# Altium PCB pcb_hydra_power.PcbDoc
Units mm, origin at the board's own origin, x right, y up, seen from the top; angles counter-clockwise.
Board outline 37.5 x 28.5 mm, 2 copper layers (Top Layer, Bottom Layer), stack 1.671 mm thick; 17 components, 15 nets, 56 pads, 17 vias.
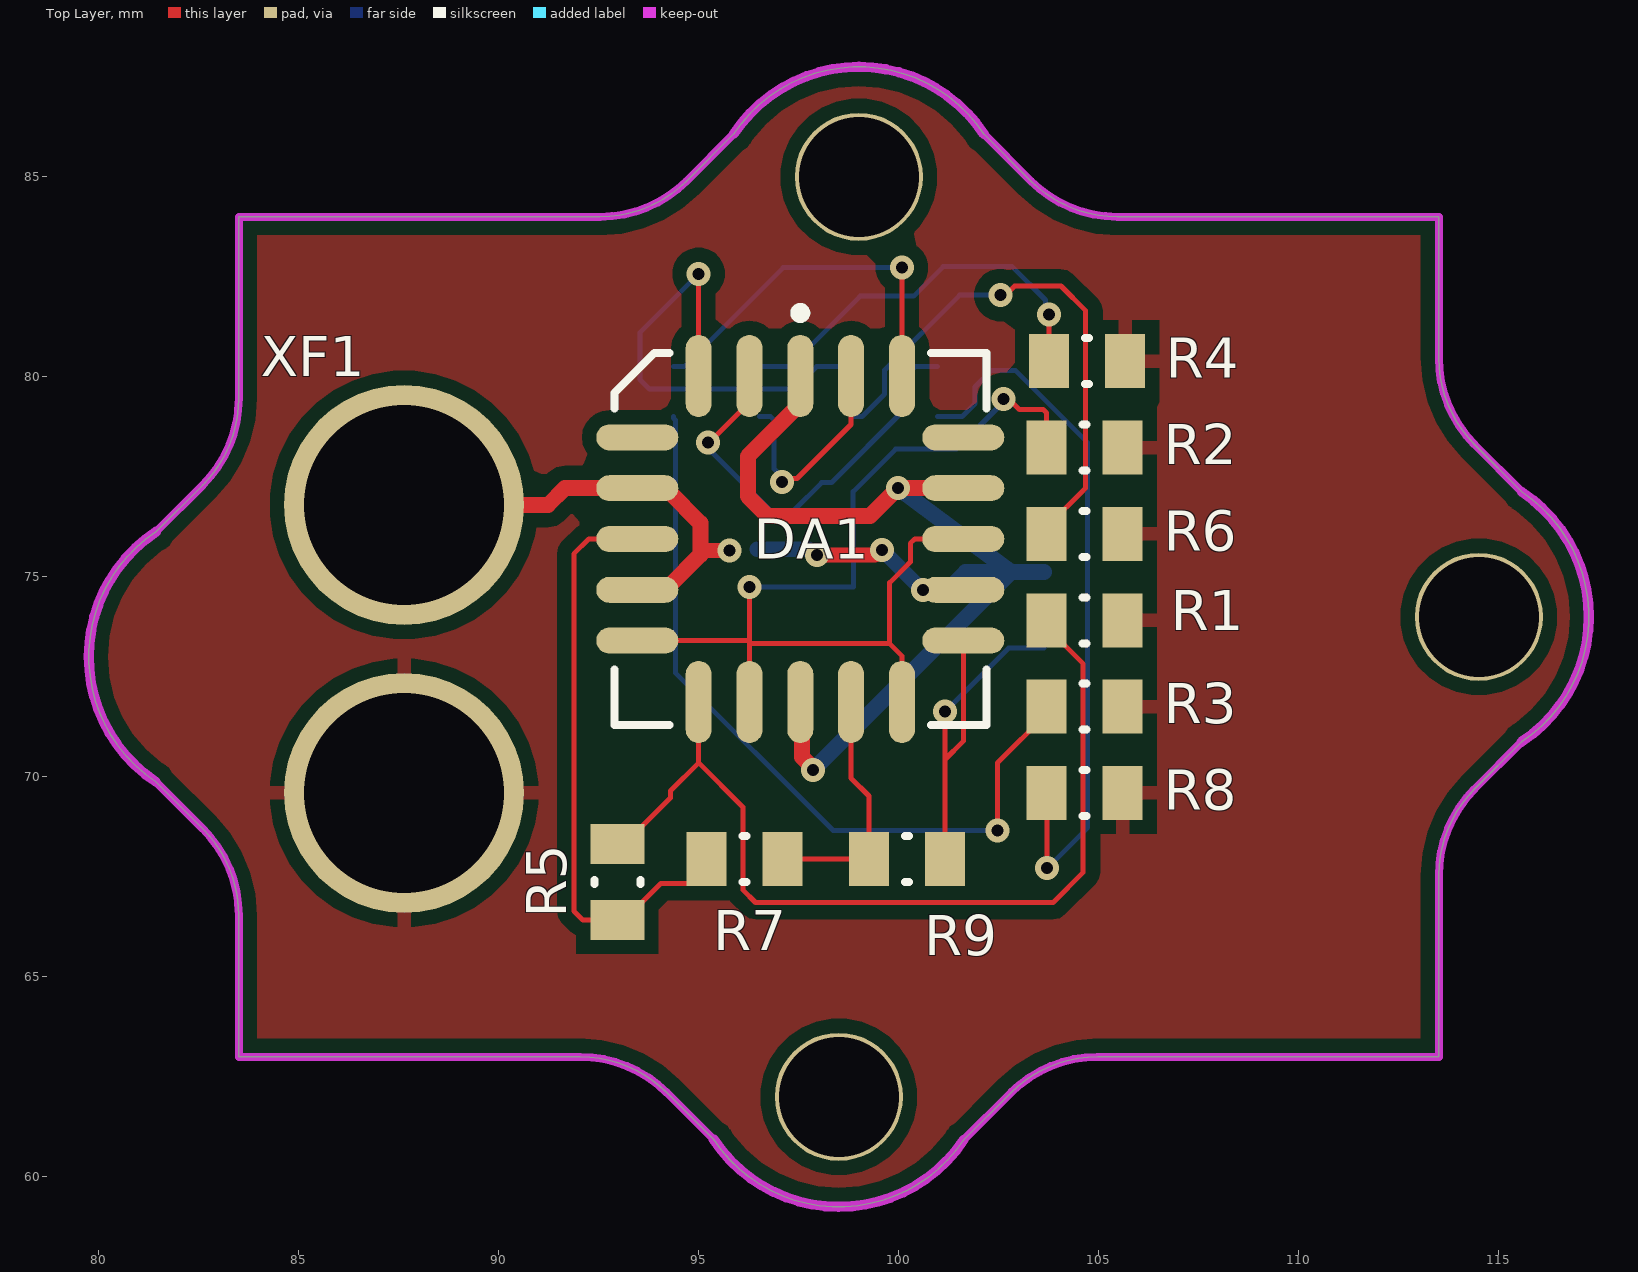
[diagram p0: Top Layer view]
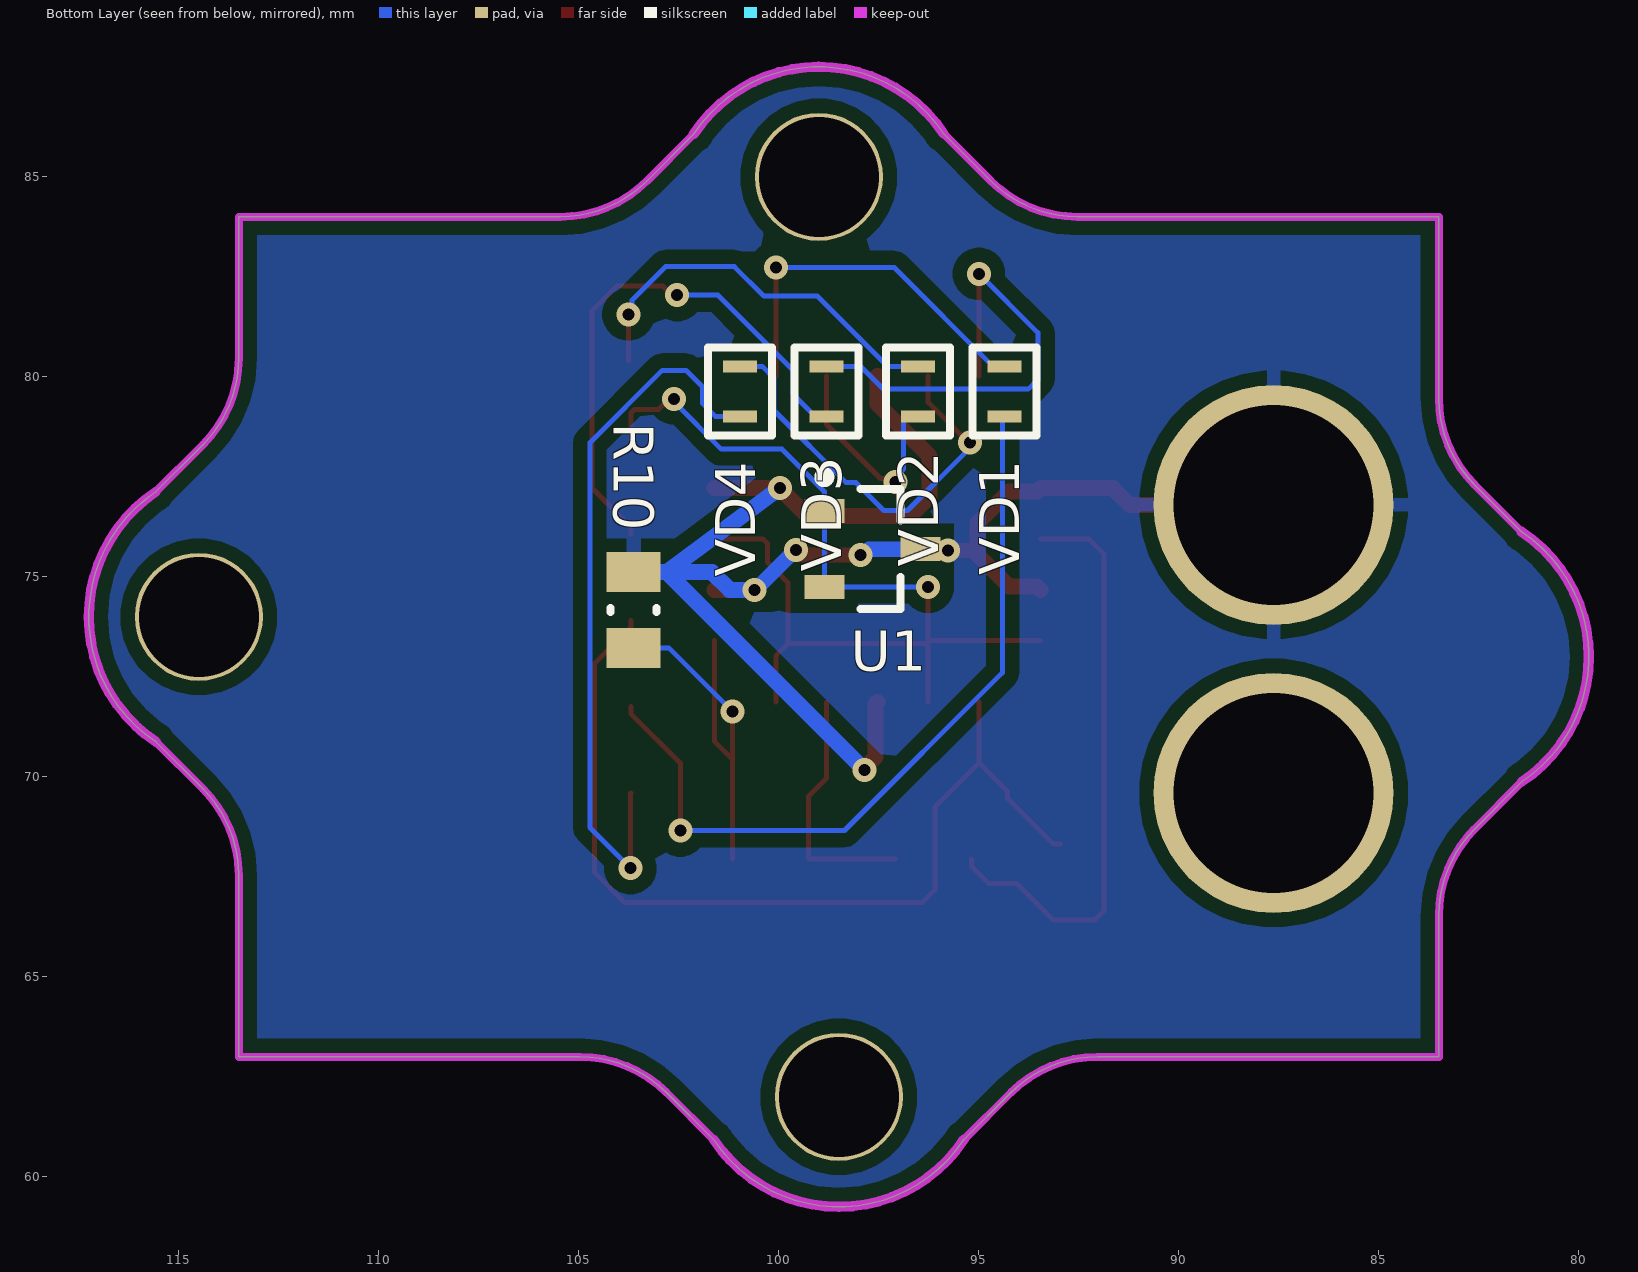
[diagram p1: Bottom Layer view, seen from below]
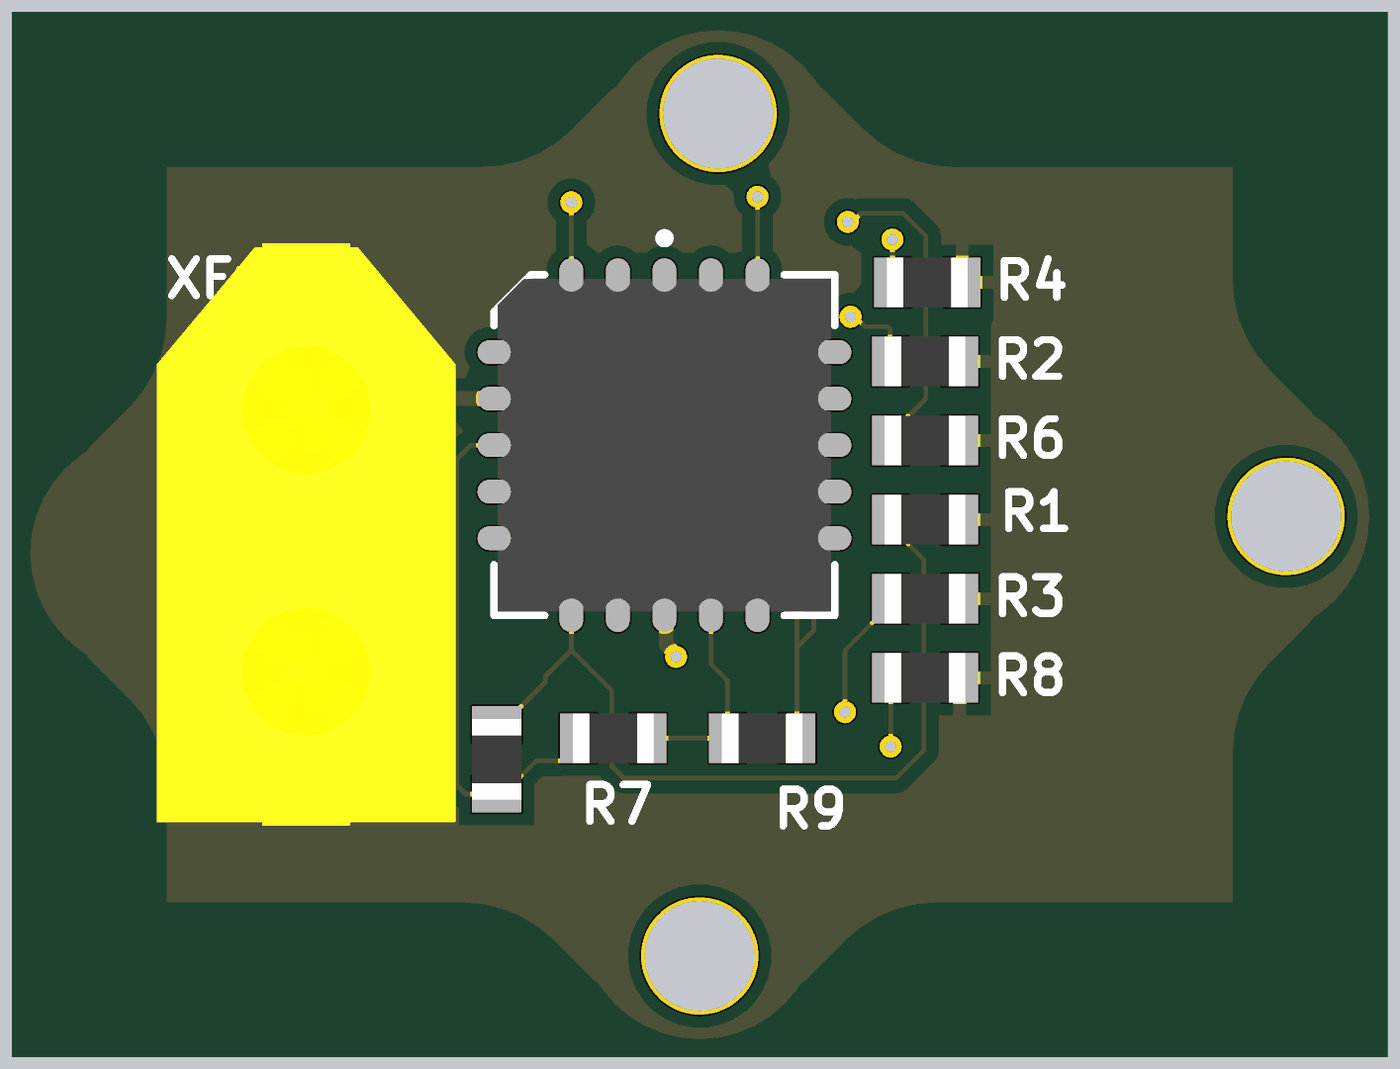
[diagram p2: 3D render of the assembled board from above, using the file's embedded part models]
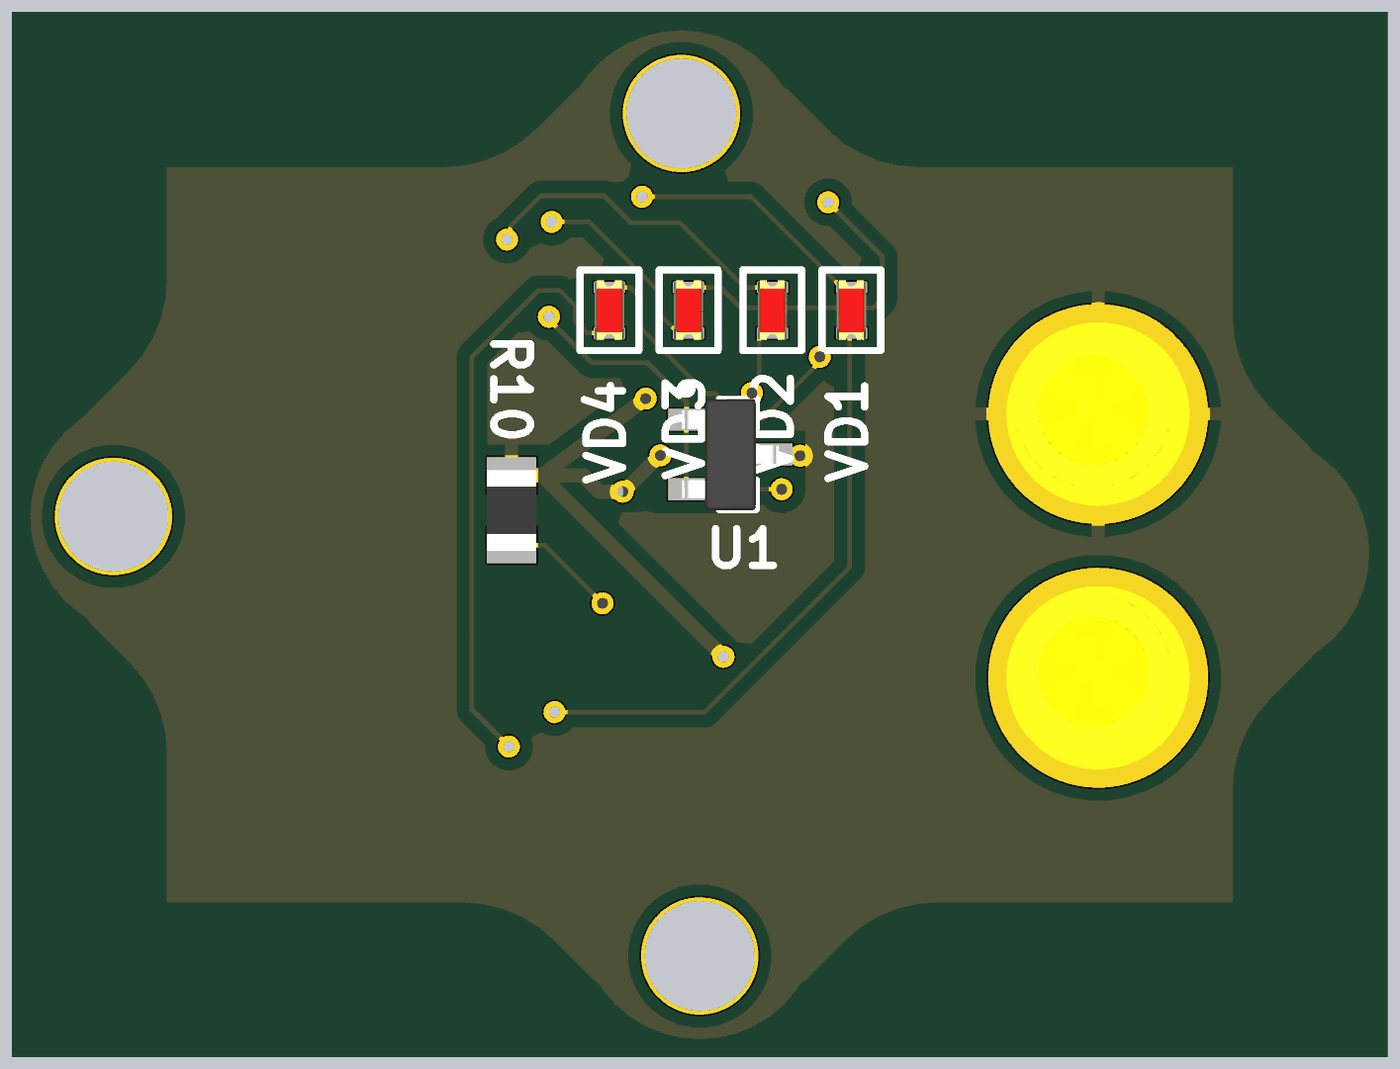
[diagram p3: 3D render of the assembled board from below, using the file's embedded part models]

## Layer stack, top to bottom
Top Solder: solder mask 0.0102, Solder Resist, Dk 3.5
Top Layer: signal copper 0.0356
Dielectric 1: dielectric 1.6, FR-4, Dk 4.8
Bottom Layer: signal copper 0.0356
Bottom Solder: solder mask 0.0102, Solder Resist, Dk 3.5

## Board outline
83.5,63 83.5,66.529 ccw(c80.434,66.529) 82.602,68.697 81.418,69.881 cw(c83.5,73) 81.43,76.127 82.602,77.299 ccw(c80.434,79.467) 83.5,79.467 83.5,84 92.529,84 ccw(c92.529,87.066) 94.697,84.898 95.881,86.082 cw(c99,84) 102.127,86.07 103.299,84.898 ccw(c105.467,87.066) 105.467,84 113.5,84 113.5,80.471 ccw(c116.566,80.471) 114.398,78.303 115.582,77.119 cw(c113.5,74) 115.57,70.873 114.398,69.701 ccw(c116.566,67.533) 113.5,67.533 113.5,63 104.971,63 ccw(c104.971,59.934) 102.803,62.102 101.619,60.918 cw(c98.5,63) 95.373,60.93 94.201,62.102 ccw(c92.033,59.934) 92.033,63

## Design rules (kind name [scope] priority, off if disabled: settings)
AcuteAngle [All] p1: minimum=3.50000000000000E+0001 checktracksonly=FALSE
BoardOutlineClearance "BoardOutlineClearance 1" [All] p1: gap=0.25 ignorepadtopadclearanceinfootprint=FALSE except(0: Arc-SplitContinuation Track-SplitContinuation SMDPad-SplitContinuation THPad-SplitContinuation Via-SplitContinuation Fill-SplitContinuation Poly-SplitContinuation Region-SplitContinuation Text-SplitContinuation) // Milling
BoardOutlineClearance "BoardOutlineClearance 2" [All] p2: gap=0.4 ignorepadtopadclearanceinfootprint=FALSE except(0: Arc-SplitContinuation Track-SplitContinuation SMDPad-SplitContinuation THPad-SplitContinuation Via-SplitContinuation Fill-SplitContinuation Poly-SplitContinuation Region-SplitContinuation Text-SplitContinuation) // V-Cut
Clearance "Clearance 3 Oz" [All] p1: gap=0.35 ignorepadtopadclearanceinfootprint=FALSE except(0.25: Arc-Hole Track-Hole SMDPad-Hole THPad-Hole Via-Hole Fill-Hole Poly-Hole Region-Hole Text-Hole)
Clearance "Clearance 2 Oz" [All] p2: gap=0.3 ignorepadtopadclearanceinfootprint=FALSE except(0.25: Arc-Hole Track-Hole SMDPad-Hole THPad-Hole Via-Hole Fill-Hole Poly-Hole Region-Hole Text-Hole)
Clearance "Clearance-1 1 Oz" [All] p3: gap=0.2 ignorepadtopadclearanceinfootprint=FALSE except(0.25: Arc-Hole Track-Hole SMDPad-Hole THPad-Hole Via-Hole Fill-Hole Poly-Hole Region-Hole Text-Hole) // Standart
Clearance "Clearance-2 1 Oz" [All] p4: gap=0.15 ignorepadtopadclearanceinfootprint=FALSE except(0.2: Arc-Fill Arc-Poly Track-Fill Track-Poly SMDPad-Fill SMDPad-Poly THPad-Fill THPad-Poly Via-Fill Via-Poly Fill-Fill Fill-Poly Poly-Poly; 0.25: Arc-Hole Track-Hole SMDPad-Hole THPad-Hole Via-Hole Fill-Hole Poly-Hole Region-Hole Text-Hole) // Advance
Clearance "Clearance-1 1/2 Oz" [All] p5: gap=0.125 ignorepadtopadclearanceinfootprint=FALSE except(0.2: Arc-Fill Arc-Poly Track-Fill Track-Poly SMDPad-SMDPad SMDPad-Fill SMDPad-Poly THPad-Fill THPad-Poly Via-Fill Via-Poly Fill-Fill Fill-Poly Poly-Poly Poly-Region Poly-Text; 0.25: Arc-Hole Track-Hole SMDPad-Hole THPad-Hole Via-Hole Fill-Hole Poly-Hole Region-Hole Text-Hole) // Standart
Clearance "Clearance-2 1/2 Oz" [All] p6: gap=0.1 ignorepadtopadclearanceinfootprint=FALSE except(0.15: Arc-Fill Arc-Poly Track-Fill Track-Poly SMDPad-SMDPad SMDPad-Fill SMDPad-Poly THPad-Fill THPad-Poly Via-Fill Via-Poly Fill-Fill Fill-Poly Poly-Poly Poly-Region Poly-Text; 0.25: Arc-Hole Track-Hole SMDPad-Hole THPad-Hole Via-Hole Fill-Hole Poly-Hole Region-Hole Text-Hole) // Advance
DiffPairsRouting "DiffPairsRouting 1 Oz" [All] p1: maxlimit=0.254 minlimit=0.2 mostfreqgap=0.254 toplayer_minwidth=0.2 toplayer_maxwidth=0.381 toplayer_prefwidth=0.381 bottomlayer_minwidth=0.2 bottomlayer_maxwidth=0.381 bottomlayer_prefwidth=0.381 maxuncoupledlength=12.7
DiffPairsRouting "DiffPairsRouting 1/2 Oz" [All] p2: maxlimit=0.254 minlimit=0.1 mostfreqgap=0.254 toplayer_minwidth=0.1 toplayer_maxwidth=0.381 toplayer_prefwidth=0.381 bottomlayer_minwidth=0.1 bottomlayer_maxwidth=0.381 bottomlayer_prefwidth=0.381 maxuncoupledlength=12.7
HoleSize "Minimum HoleSize" [IsPad] p1: absolutevalues=TRUE maxlimit=5.9 minlimit=0.6 maxpercent=80.000 minpercent=20.000
HoleSize "Minimum HoleSize VIA 1" [IsVia] p2: absolutevalues=TRUE maxlimit=5.9 minlimit=0.3 maxpercent=80.000 minpercent=20.000 // Standart
HoleSize "Minimum HoleSize VIA 2" [IsVia] p3: absolutevalues=TRUE maxlimit=5.9 minlimit=0.2 maxpercent=80.000 minpercent=20.000 // Advance
HoleToHoleClearance Hole2HoleClearance [All] p1: gap=0.25 allowstackedmicrovias=FALSE
MinimumAnnularRing "Minimum AR VIA Standart" [IsVia] p1: minimumring=0.15
MinimumAnnularRing "Minimum AR PAD Standart" [IsPAD] p2: minimumring=0.2
MinimumAnnularRing "Minimum AR VIA Advance" [IsVia] p3: minimumring=0.1
MinimumAnnularRing "Minimum AR PAD Advance" [IsPAD] p4: minimumring=0.15
MinimumSolderMaskSliver "SolderMask Bridge Standart" [All] p1: minsoldermaskwidth=0.15 // All Masks
MinimumSolderMaskSliver "SolderMask Bridge Advance" [All] p2: minsoldermaskwidth=0.1 // Mask LDI
PlaneClearance "PlaneClearance 3 Oz" [All] p1: clearance=0.35
PlaneClearance "PlaneClearance 2 Oz" [All] p2: clearance=0.3
PlaneClearance "PlaneClearance 1 Oz" [All] p3: clearance=0.2
PlaneClearance "PlaneClearance-1 1/2 Oz" [All] p4: clearance=0.2 // Standart
PlaneClearance "PlaneClearance-2 1/2 Oz" [All] p5: clearance=0.15 // Advance
PlaneConnect "TermalConnect 3 Oz" [All] p1: planeconnectstyle=Relief reliefexpansion=0.2 reliefentries=4 reliefconductorwidth=0.35 reliefairgap=0.35 // Standart
PlaneConnect "TermalConnect 2 Oz" [All] p2: planeconnectstyle=Relief reliefexpansion=0.2 reliefentries=4 reliefconductorwidth=0.3 reliefairgap=0.3 // Standart
PlaneConnect "TermalConnect-1 1 Oz" [All] p3: planeconnectstyle=Relief reliefexpansion=0.2 reliefentries=4 reliefconductorwidth=0.2 reliefairgap=0.2 // Standart
PlaneConnect "TermalConnect-2 1 Oz" [All] p4: pad.planeconnectstyle=Relief pad.reliefexpansion=0.15 pad.reliefentries=4 pad.reliefconductorwidth=0.2 pad.reliefairgap=0.2 via.planeconnectstyle=Direct via.reliefexpansion=0.15 via.reliefentries=4 via.reliefconductorwidth=0.15 via.reliefairgap=0.15 // Advance
PlaneConnect "TermalConnect-1 1/2 Oz" [All] p5: planeconnectstyle=Relief reliefexpansion=0.2 reliefentries=4 reliefconductorwidth=0.2 reliefairgap=0.2 // Standart
PlaneConnect "TermalConnect-2 1/2 Oz" [All] p6: pad.planeconnectstyle=Relief pad.reliefexpansion=0.15 pad.reliefentries=4 pad.reliefconductorwidth=0.15 pad.reliefairgap=0.15 via.planeconnectstyle=Direct via.reliefexpansion=0.15 via.reliefentries=4 via.reliefconductorwidth=0.15 via.reliefairgap=0.15 // Advance
PolygonConnect "PolygonConnect 3 Oz" [All] p1: thpad.connectstyle=Relief thpad.reliefconductorwidth=0.35 thpad.reliefentries=4 thpad.polygonreliefangle="90 Angle" thpad.airgapwidth=0.35 smdpad.connectstyle=Relief smdpad.reliefconductorwidth=0.35 smdpad.reliefentries=4 smdpad.polygonreliefangle="90 Angle" smdpad.airgapwidth=0.35 via.connectstyle=Direct via.reliefconductorwidth=0.254 via.reliefentries=4 via.polygonreliefangle="90 Angle" via.airgapwidth=0.254
PolygonConnect "PolygonConnect 2 Oz" [All] p2: thpad.connectstyle=Relief thpad.reliefconductorwidth=0.3 thpad.reliefentries=4 thpad.polygonreliefangle="90 Angle" thpad.airgapwidth=0.3 smdpad.connectstyle=Relief smdpad.reliefconductorwidth=0.3 smdpad.reliefentries=4 smdpad.polygonreliefangle="90 Angle" smdpad.airgapwidth=0.3 via.connectstyle=Direct via.reliefconductorwidth=0.254 via.reliefentries=4 via.polygonreliefangle="90 Angle" via.airgapwidth=0.254
PolygonConnect "PolygonConnect-1 1 Oz" [All] p3: thpad.connectstyle=Relief thpad.reliefconductorwidth=0.2 thpad.reliefentries=4 thpad.polygonreliefangle="90 Angle" thpad.airgapwidth=0.2 smdpad.connectstyle=Relief smdpad.reliefconductorwidth=0.2 smdpad.reliefentries=4 smdpad.polygonreliefangle="90 Angle" smdpad.airgapwidth=0.2 via.connectstyle=Direct via.reliefconductorwidth=0.254 via.reliefentries=4 via.polygonreliefangle="90 Angle" via.airgapwidth=0.254 // Standart
PolygonConnect "PolygonConnect-2 1 Oz" [All] p4: thpad.connectstyle=Relief thpad.reliefconductorwidth=0.15 thpad.reliefentries=4 thpad.polygonreliefangle="90 Angle" thpad.airgapwidth=0.15 smdpad.connectstyle=Relief smdpad.reliefconductorwidth=0.15 smdpad.reliefentries=4 smdpad.polygonreliefangle="90 Angle" smdpad.airgapwidth=0.15 via.connectstyle=Direct via.reliefconductorwidth=0.254 via.reliefentries=4 via.polygonreliefangle="90 Angle" via.airgapwidth=0.254 // Advance
PolygonConnect "PolygonConnect-1 1/2 Oz" [All] p5: thpad.connectstyle=Relief thpad.reliefconductorwidth=0.15 thpad.reliefentries=4 thpad.polygonreliefangle="90 Angle" thpad.airgapwidth=0.2 smdpad.connectstyle=Relief smdpad.reliefconductorwidth=0.2 smdpad.reliefentries=4 smdpad.polygonreliefangle="90 Angle" smdpad.airgapwidth=0.2 via.connectstyle=Direct via.reliefconductorwidth=0.254 via.reliefentries=4 via.polygonreliefangle="90 Angle" via.airgapwidth=0.254 // Standart
PolygonConnect "PolygonConnect-2 1/2 Oz" [All] p6: thpad.connectstyle=Relief thpad.reliefconductorwidth=0.125 thpad.reliefentries=4 thpad.polygonreliefangle="90 Angle" thpad.airgapwidth=0.15 smdpad.connectstyle=Relief smdpad.reliefconductorwidth=0.125 smdpad.reliefentries=4 smdpad.polygonreliefangle="90 Angle" smdpad.airgapwidth=0.15 via.connectstyle=Direct via.reliefconductorwidth=0.254 via.reliefentries=4 via.polygonreliefangle="90 Angle" via.airgapwidth=0.254 // Advance
RoutingCorners [All] p1 off: cornerstyle=45-Degree minsetback=2.54 maxsetback=2.54
RoutingVias [All] p1: holewidth=0.3 width=0.6 viastyle="Through Hole" minholewidth=0.2 minwidth=0.4 maxholewidth=5.9 maxwidth=6.4
SilkToSilkClearance Silk2SilkClearance [All] p1 off: silktosilkclearance=0.15
SilkToSolderMaskClearance Silk2SolderMaskClearance [IsPad] p1 off: minsilkscreentomaskgap=0.15 clearancetoexposedcopper=TRUE
SolderMaskExpansion SolderMaskExpansion-1 [All] p1: expansion=0.05 istentingtop=FALSE // Standart
SolderMaskExpansion "SolderMaskExpansion LDI" [All] p2: expansion=0.025 istentingtop=FALSE // Advance
SupplyNets "Schematic Supply Nets_1" [InNet('GND')] p1: voltage=0.000
SupplyNets "Schematic Supply Nets" [InNet('VCC')] p2: voltage=0.000
UnRoutedNet [All] p1: checkbadconnections=TRUE
Width "Width 3 Oz" [InNetClass('power')] p1: maxlimit=10 minlimit=0.35 preferedwidth=0.4 checkconnectedcopper=TRUE
Width "Width 1/2 Oz" [InNetClass('signals')] p2: maxlimit=10 minlimit=0.1 preferedwidth=0.125 checkconnectedcopper=TRUE
Width "Width 2 Oz" [All] p3: maxlimit=10 minlimit=0.3 preferedwidth=0.35 minimp=50.000000 maximp=50.000000 favimp=50.000000 checkconnectedcopper=TRUE
Width "Width 1 Oz" [All] p4: maxlimit=10 minlimit=0.15 preferedwidth=0.2 checkconnectedcopper=TRUE
20 further rules are at their usual default settings.

## Classes and differential pairs
net class power: GND VCC
net class signals: NetDA1_2 NetDA1_3 NetDA1_6 NetDA1_8 NetDA1_9 NetDA1_12 NetDA1_14 NetDA1_19 NetDA1_20 NetR3_1 NetR4_1 NetR6_1 NetR8_1

## Components (designator, comment, footprint, x,y, rotation, side; value= is the part's Value field where it differs from the comment)
DA1 "LM139" LCC127P889X889X223-20N 97.536,75.946 r0 top
R1 "R" EIA0805 104.648,73.914 r0 top
R2 "R" EIA0805 104.648,78.232 r0 top
R3 "R" EIA0805 104.648,71.755 r0 top
R4 "R" EIA0805 104.709,80.391 r0 top
R5 "R" EIA0805 92.964,67.371 r90 top
R6 "R" EIA0805 104.648,76.073 r0 top
R7 "R" EIA0805 96.139,67.945 r180 top
R8 "R" EIA0805 104.648,69.596 r0 top
R9 "R" EIA0805 100.203,67.945 r180 top
R10 "R" EIA0805 103.632,74.168 r270 bottom
U1 "TLA431" SOT95P237X112-3N 97.663,75.692 r180 bottom
VD1 "Led_diod" "LED 0603" 94.361,79.629 r90 bottom
VD2 "Led_diod" "LED 0603" 96.52,79.629 r270 bottom
VD3 "Led_diod" "LED 0603" 98.806,79.629 r90 bottom
VD4 "Led_diod" "LED 0603" 100.965,79.629 r90 bottom
XF1 "PIN_POWER" XT60 87.63,69.596 r90 top

## Footprints (in the part's own frame and the unit in brackets; to place one, negate y for a bottom-side part, rotate by r counter-clockwise, add the part's x,y. Pads: shape width x height; smd on the part's side, far side on the other; paste and mask are expansions set on the pad)
EIA0805 [mm] "1/8W 150-300V"
  rect 1x1.35 smd: 1(-0.95,0) 2(0.95,0)
  silkscreen extent -0.05,-0.58 0.05,0.58, body extent -1.1,-0.67 1.1,0.67, height 0.45
LCC127P889X889X223-20N [mm] "LCC, 20-Pins, Body 8,89x8,89mmx2,23mm, Pitch 1,27mm, IPC Medium Density"
  oval 0.65x2.05 smd: 1(0,4.075) 2(-1.27,4.075) 3(-2.54,4.075) 9(-2.54,-4.075) 10(-1.27,-4.075) 11(0,-4.075) 12(1.27,-4.075) 13(2.54,-4.075) 19(2.54,4.075) 20(1.27,4.075)
  oval 2.05x0.65 smd: 4(-4.075,2.54) 5(-4.075,1.27) 6(-4.075,0) 7(-4.075,-1.27) 8(-4.075,-2.54) 14(4.075,-2.54) 15(4.075,-1.27) 16(4.075,0) 17(4.075,1.27) 18(4.075,2.54)
  silkscreen extent -4.65,-4.65 4.65,5.77, body extent -4.54,-4.54 4.54,4.54, height 2.23
"LED 0603" [mm]
  rect 0.3x0.85 smd: 1(-0.625,0) 2(0.625,0)
  silkscreen extent -1.1,-0.8 1.1,0.8, body extent -0.81,-0.4 0.81,0.4, height 0.6
SOT95P237X112-3N [mm] "SOT23, 3-Leads, Body 2,92x2,37mm, Pitch 0,95mm, IPC Medium Density"
  rect 1x0.6 smd: 1(-1.2,0.95) 2(-1.2,-0.95) 3(1.2,0)
  silkscreen extent -1.33,-1.5 0.7,1.92, body extent -1.32,-1.52 1.32,1.52, height 1.12
XT60 [mm]
  round 6 hole 5: 1(0,0) 2(7.2,0)
  body extent -4.04,-4.21 11.86,3.94, height 17

## Free pads (board coordinates)
  round 3.2 hole 3: 3(99,85) 4(114.5,74) 5(98.5,62)

## Via types
v1: diameter 0.6, hole 0.3, Top Layer to Bottom Layer, 17 vias

## Nets (pads, with @x,y where several pads share a name; then routed paths per layer and width w, separated by ;. In a path a pad name is that pad's centre, name@x,y a point inside that pad or via, vN(x,y) a via of type N, cw(c..) or ccw(c..) an arc to the next point about the centre after c; other vN are vias at no path point)
GND: DA1.1 DA1.5 DA1.7 DA1.11 DA1.15 DA1.17 R10.1 U1.3 XF1.2 | length 42.1
  Top Layer w0.381: 95.036,75.551 95.143,75.658 v1(95.765,75.658) ; v1(97.953,75.547) 99.398,75.547 99.516,75.665 v1(99.575,75.665)
  Top Layer w0.4: XF1.2 91.23,76.796 91.65,77.216 DA1.5 93.543,77.134 94.243,77.134 95.036,76.341 95.036,75.551 94.243,74.758 93.543,74.758 DA1.7 ; DA1.11 97.584,71.823 97.584,70.491 97.853,70.222 v1(97.853,70.168) ; DA1.1 97.536,79.321 96.229,78.014 96.229,77.016 96.727,76.518 99.277,76.518 v1(99.974,77.216) DA1.17 ; v1(100.602,74.676) DA1.15
  Bottom Layer w0.381: U1.3 97.749,75.692 97.894,75.547 v1(97.953,75.547) ; v1(99.575,75.665) 99.594,75.665 100.583,74.676 v1(100.602,74.676)
  Bottom Layer w0.4: v1(97.853,70.168) 102.804,75.118 ; v1(99.974,77.216) 102.804,75.118 ; v1(100.602,74.676) 101.231,74.676 101.673,75.118 102.804,75.118 ; R10.1 102.804,75.118
NetDA1_2: DA1.2 VD4.2 | length 10.6
  Top Layer w0.125: v1(95.225,78.359) 95.264,78.359 96.266,79.361 DA1.2
  Bottom Layer w0.125: v1(95.225,78.359) 95.315,78.268 95.315,78.124 96.784,76.656 97.374,76.656 98.073,77.355 98.315,77.355 100.119,79.158 100.119,79.969 100.403,80.254 VD4.2
NetDA1_3: DA1.3 VD3.2 | length 11.4
  Top Layer w0.125: DA1.3 v1(94.996,82.575)
  Bottom Layer w0.125: v1(94.996,82.575) 93.523,81.103 93.523,79.933 93.765,79.691 97.382,79.691 97.944,80.254 VD3.2
NetDA1_6: DA1.6 R5.1 R7.2 | length 14.8
  Top Layer w0.125: DA1.6 92.248,75.946 91.876,75.574 91.876,66.646 92.101,66.421 93.139,66.421 94.051,67.333 94.751,67.333 95.189,67.77 R7.2
NetDA1_8: DA1.8 DA1.10 DA1.13 DA1.16 R2.1 U1.1 U1.2 | length 26.7
  Top Layer w0.125: DA1.8 96.266,73.406 ; DA1.10 96.266,73.33 ; v1(96.266,74.742) 96.266,73.406 ; DA1.13 100.076,73.025 99.771,73.33 ; DA1.16 100.399,75.946 100.288,75.835 100.288,75.37 99.771,74.853 99.771,73.33 ; v1(102.616,79.451) 102.745,79.451 103.012,79.184 103.609,79.184 103.698,79.095 R2.1 ; 96.266,73.33 96.266,73.406 ; 96.266,73.33 99.771,73.33
  Bottom Layer w0.125: v1(96.266,74.742) U1.2 U1.1 98.857,76.648 98.857,77.13 99.92,78.193 101.438,78.193 102.616,79.371 v1(102.616,79.451)
NetDA1_9: DA1.9 R1.1 R5.2 | length 23.8
  Top Layer w0.125: R5.2 93.139,68.321 94.286,69.468 94.286,69.643 94.996,70.353 ; DA1.9 94.996,70.353 ; R1.1 103.698,73.739 104.61,72.826 104.61,67.611 103.857,66.857 96.418,66.857 96.101,67.174 96.101,69.248 94.996,70.353
NetDA1_12: DA1.12 R7.1 R9.2 | length 6.3
  Top Layer w0.125: R7.1 R9.2 99.253,69.52 98.806,69.966 DA1.12
NetDA1_14: DA1.14 R9.1 R10.2 | length 10
  Top Layer w0.125: R9.1 101.153,70.434 ; v1(101.153,71.628) 101.153,70.434 ; DA1.14 101.611,70.892 101.153,70.434
  Bottom Layer w0.125: v1(101.153,71.628) 102.743,73.218 R10.2
NetDA1_19: DA1.19 VD1.2 | length 9.4
  Top Layer w0.125: DA1.19 v1(100.076,82.728)
  Bottom Layer w0.125: VD1.2 94.636,80.254 97.11,82.728 v1(100.076,82.728)
NetDA1_20: DA1.20 VD2.2 | length 5.6
  Top Layer w0.125: v1(97.079,77.368) 97.17,77.459 97.457,77.459 98.806,78.809 DA1.20
  Bottom Layer w0.125: VD2.2 96.795,79.004 96.882,78.917 96.882,77.693 97.079,77.497 v1(97.079,77.368)
NetR3_1: R3.1 VD1.1 | length 19.7
  Top Layer w0.125: v1(102.464,68.656) 102.464,70.346 103.698,71.58 R3.1
  Bottom Layer w0.125: VD1.1 94.361,78.967 94.412,78.917 94.412,72.602 98.357,68.656 v1(102.464,68.656)
NetR4_1: R4.1 VD2.1 | length 10.1
  Top Layer w0.125: R4.1 v1(103.759,81.559)
  Bottom Layer w0.125: VD2.1 97.273,80.254 99.034,82.015 100.371,82.015 101.11,82.755 102.835,82.755 103.668,81.921 103.668,81.65 v1(103.759,81.559)
NetR6_1: R6.1 VD3.1 | length 13.8
  Top Layer w0.125: v1(102.54,82.042) 102.668,82.042 102.898,82.272 104.054,82.272 104.672,81.655 104.672,77.222 103.698,76.248 R6.1
  Bottom Layer w0.125: VD3.1 99.081,79.004 99.644,79.567 99.644,80.166 101.519,82.042 v1(102.54,82.042)
NetR8_1: R8.1 VD4.1 | length 18.2
  Top Layer w0.125: R8.1 103.708,69.586 v1(103.708,67.716)
  Bottom Layer w0.125: VD4.1 101.578,79.004 101.903,79.33 101.903,79.746 102.321,80.164 102.911,80.164 104.72,78.355 104.72,68.728 v1(103.708,67.716)
VCC: R1.2 R2.2 R3.2 R4.2 R6.2 R8.2 XF1.1
pads on no net: DA1.4 DA1.18

## Polygon pours and split planes (outlines as drawn)
VCC on Mechanical 1 "NONET_L-01_P-001" (none): 83.5,63 83.5,66.529 ccw(c80.434,66.529) 82.602,68.697 81.418,69.881 cw(c83.5,73) 81.43,76.127 82.602,77.299 ccw(c80.434,79.467) 83.5,79.467 83.5,84 92.529,84 ccw(c92.529,87.066) 94.697,84.898 95.881,86.082 cw(c99,84) 102.127,86.07 103.299,84.898 ccw(c105.467,87.066) 105.467,84 113.5,84 113.5,80.471 ccw(c116.566,80.471) 114.398,78.303 115.582,77.119 cw(c113.5,74) 115.57,70.873 114.398,69.701 ccw(c116.566,67.533) 113.5,67.533 113.5,63 104.971,63 ccw(c104.971,59.934) 102.803,62.102 101.619,60.918 cw(c98.5,63) 95.373,60.93 94.201,62.102 ccw(c92.033,59.934) 92.033,63
VCC on Top Layer "VCC_L01_P002" (solid, remove dead copper, pour order 2): 83.5,63 83.5,66.529 ccw(c80.434,66.529) 82.602,68.697 81.418,69.881 cw(c83.5,73) 81.43,76.127 82.602,77.299 ccw(c80.434,79.467) 83.5,79.467 83.5,84 92.529,84 ccw(c92.529,87.066) 94.697,84.898 95.881,86.082 cw(c99,84) 102.127,86.07 103.299,84.898 ccw(c105.467,87.066) 105.467,84 113.5,84 113.5,80.471 ccw(c116.566,80.471) 114.398,78.303 115.582,77.119 cw(c113.5,74) 115.57,70.873 114.398,69.701 ccw(c116.566,67.533) 113.5,67.533 113.5,63 104.971,63 ccw(c104.971,59.934) 102.803,62.102 101.619,60.918 cw(c98.5,63) 95.373,60.93 94.201,62.102 ccw(c92.033,59.934) 92.033,63
GND on Bottom Layer "GND_L02_P003" (solid, remove dead copper, pour order 3): 83.5,63 83.5,66.529 ccw(c80.434,66.529) 82.602,68.697 81.418,69.881 cw(c83.5,73) 81.43,76.127 82.602,77.299 ccw(c80.434,79.467) 83.5,79.467 83.5,84 92.529,84 ccw(c92.529,87.066) 94.697,84.898 95.881,86.082 cw(c99,84) 102.127,86.07 103.299,84.898 ccw(c105.467,87.066) 105.467,84 113.5,84 113.5,80.471 ccw(c116.566,80.471) 114.398,78.303 115.582,77.119 cw(c113.5,74) 115.57,70.873 114.398,69.701 ccw(c116.566,67.533) 113.5,67.533 113.5,63 104.971,63 ccw(c104.971,59.934) 102.803,62.102 101.619,60.918 cw(c98.5,63) 95.373,60.93 94.201,62.102 ccw(c92.033,59.934) 92.033,63

## Keep-outs
Keep-Out Layer:
  lines w0.2: 81.418,69.881 82.602,68.697 cw(c80.434,66.529) 83.5,66.529 83.5,63 92.033,63 cw(c92.033,59.934) 94.201,62.102 95.373,60.93 ; 81.43,76.127 82.602,77.299 ccw(c80.434,79.467) 83.5,79.467 83.5,84 92.529,84 ccw(c92.529,87.066) 94.697,84.898 95.881,86.082 ; 101.619,60.918 102.803,62.102 cw(c104.971,59.934) 104.971,63 113.5,63 113.5,67.533 cw(c116.566,67.533) 114.398,69.701 115.57,70.873 ; 102.127,86.07 103.299,84.898 ccw(c105.467,87.066) 105.467,84 107,84 113.5,84 113.5,80.471 ccw(c116.566,80.471) 114.398,78.303 115.582,77.119
  lines w0.254: 81.418,69.881 cw(c83.5,73) 81.43,76.127 ; 95.373,60.93 ccw(c98.5,63) 101.619,60.918 ; 95.881,86.082 cw(c99,84) 102.127,86.07 ; 115.57,70.873 ccw(c113.5,74) 115.582,77.119

## Silkscreen, mask and mechanical layers (free items; w line width, h text height)
Mechanical 1:
  lines w0.2: 81.418,69.881 82.602,68.697 cw(c80.434,66.529) 83.5,66.529 83.5,63 92.033,63 cw(c92.033,59.934) 94.201,62.102 95.373,60.93 ; 81.43,76.127 82.602,77.299 ccw(c80.434,79.467) 83.5,79.467 83.5,84 92.529,84 ccw(c92.529,87.066) 94.697,84.898 95.881,86.082 ; 101.619,60.918 102.803,62.102 cw(c104.971,59.934) 104.971,63 113.5,63 113.5,67.533 cw(c116.566,67.533) 114.398,69.701 115.57,70.873 ; 102.127,86.07 103.299,84.898 ccw(c105.467,87.066) 105.467,84 107,84 113.5,84 113.5,80.471 ccw(c116.566,80.471) 114.398,78.303 115.582,77.119
  lines w0.254: 81.418,69.881 cw(c83.5,73) 81.43,76.127 ; 95.373,60.93 ccw(c98.5,63) 101.619,60.918 ; 95.881,86.082 cw(c99,84) 102.127,86.07 ; 115.57,70.873 ccw(c113.5,74) 115.582,77.119